# Altium PCB DLP.PcbDoc
Units mil, origin at the board's own origin, x right, y up, seen from the top; angles counter-clockwise.
Board outline 6000 x 4000 mil, 2 copper layers (Top Layer, Bottom Layer); 59 components, 221 nets, 461 pads, 232 vias.
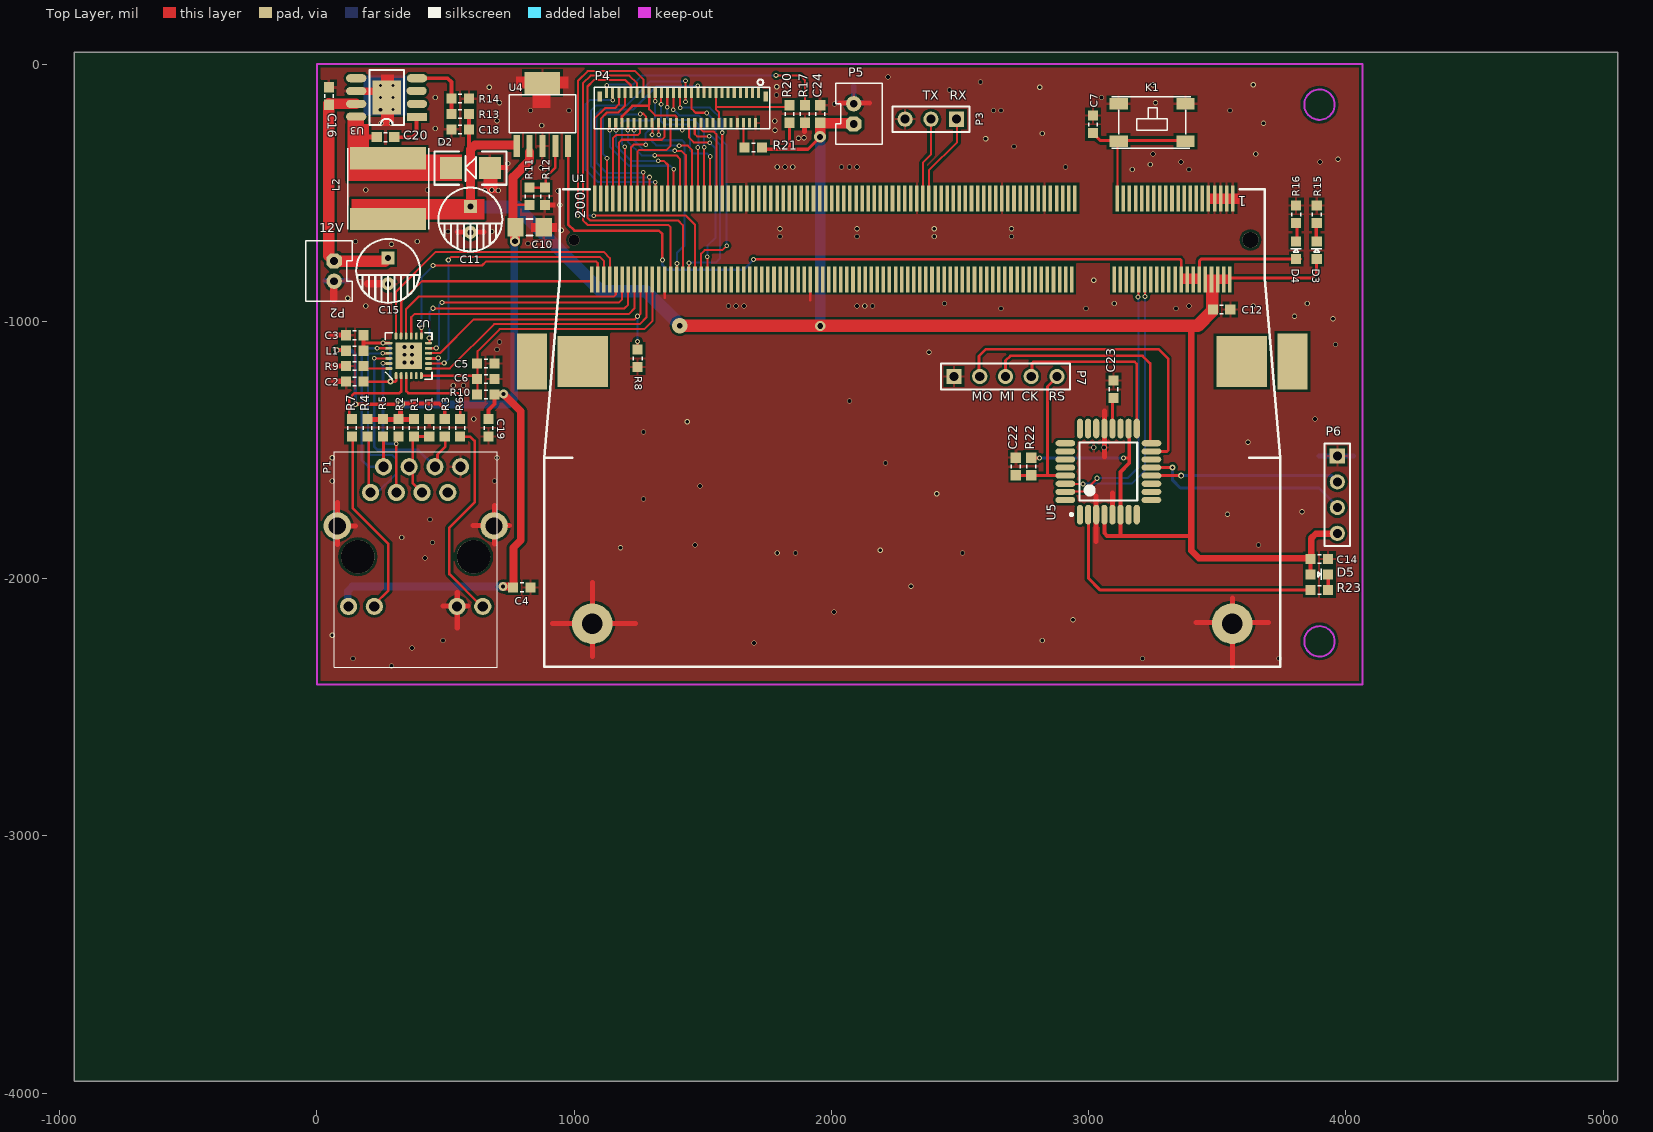
[diagram p0: Top Layer view]
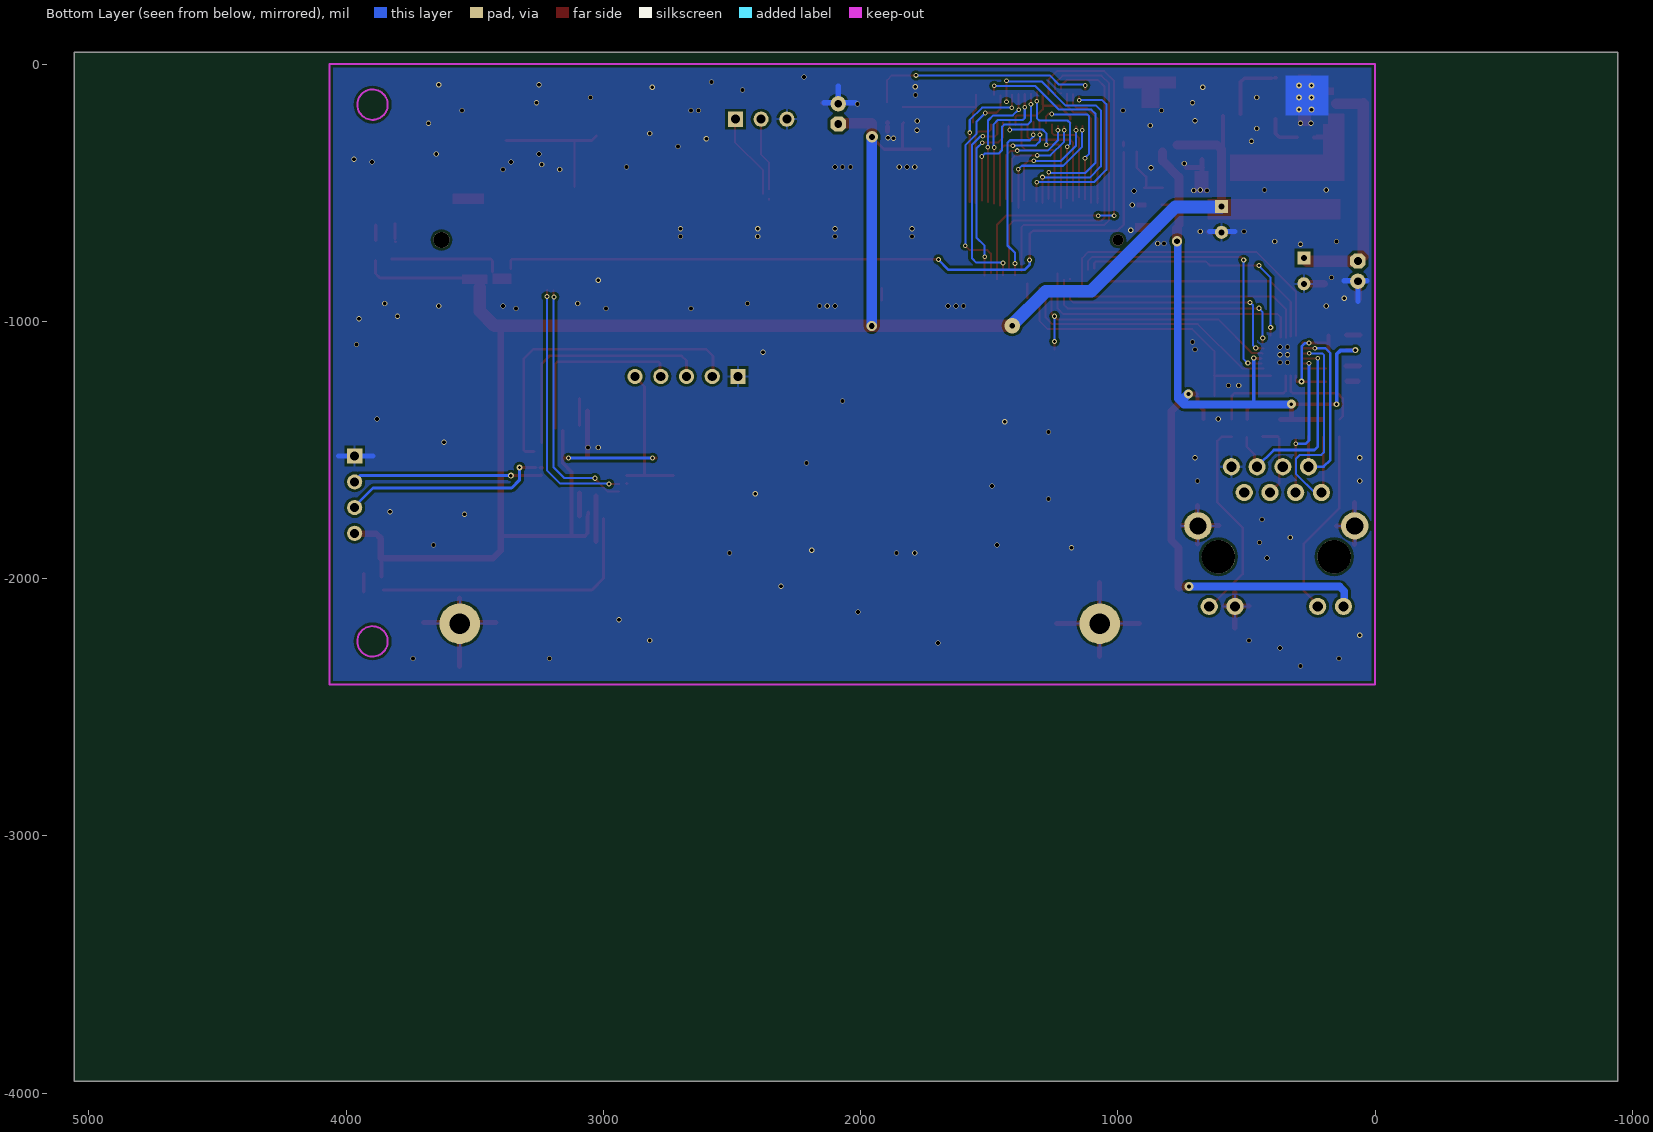
[diagram p1: Bottom Layer view, seen from below]

## Layer stack, top to bottom
Top Layer: signal copper 1.4
Dielectric: dielectric 12.6, FR-4, Dk 4.8
Bottom Layer: signal copper 1.4

## Board outline
-943,-3954 5057,-3954 5057,46 -943,46

## Design rules (kind name [scope] priority, off if disabled: settings)
Clearance [All] p1 off: gap=10
ComponentClearance [All] p1 off: gap=10 collisioncheckmode=3 verticalgap=10
HoleSize [All] p1: absolutevalues=TRUE maxlimit=150 minlimit=1 maxpercent=80.000 minpercent=20.000
PolygonConnect [All] p1: connectstyle=Relief reliefconductorwidth=10 reliefentries=4 polygonreliefangle="90 Angle"
RoutingVias [All] p1: holewidth=14 width=28 viastyle="Through Hole" minholewidth=8 minwidth=15 maxholewidth=130 maxwidth=150
SolderMaskExpansion [All] p1: expansion=4
TestPointUsage [All] p1: valid=0 allowmultiple=FALSE
Testpoint [All] p1: side=15 testpointundercomponent=TRUE minsize=40 maxsize=100 preferedsize=60 minholesize=0 maxholesize=40 preferedholesize=32 testpointgrid=1 style=1023 order=0-112345678
Width [All] p1: maxlimit=100 minlimit=8 preferedwidth=10 minimp=50.000000 maximp=50.000000 favimp=50.000000
17 further rules are at their usual default settings.

## Components (designator, comment, footprint, x,y, rotation, side; value= is the part's Value field where it differs from the comment)
C1 "104" 0603 437,-1414 r90 top
C2 "104" 0603 147,-1234 r180 top
C3 "104" 0603 147,-1054 r180 top
C4 "104" 0603 797,-2034 r180 top
C5 "104" 0603 657,-1164 r0 top
C6 "104" 0603 657,-1224 r0 top
C7 "100PF" 0603 3017,-234 r270 top
C10 "470uF/16V" 3216[1206] 827,-634 r0 top
C11 "470uF/16V" C6.3*12 597,-654 r90 top
C12 "100nF" 0603 3517,-954 r180 top
C14 "100nF" 0603 3897,-1924 r180 top
C15 "100uF/35V" C6.3*12 277,-854 r90 top
C16 "100nF" 0603 47,-124 r270 top
C18 "106" 0603 557,-254 r180 top
C19 "104" 0603 667,-1414 r90 top
C20 "10nF" 0603 267,-284 r0 top
C22 "Cap" 0603 2717,-1564 r90 top
C23 "Cap" 0603 3097,-1264 r90 top
C24 "Cap" 0603 1957,-194 r90 top (schematic designator C23)
D2 "SS34" SMA 597,-404 r180 top
D3 "BLUE" 0603-LED 3887,-724 r90 top
D4 "BLUE" 0603-LED 3807,-724 r90 top
D5 "BLUE" 0603-LED 3897,-1984 r0 top
K1 "AJ" 4*4*1.5 3117,-154 r0 top
L1 "120 OHM@100MHz" 0603 147,-1114 r180 top
L2 "10uH/4A" 8040 277,-484 r270 top
P1 "HR911105A" HR911105A 357,-1794 r0 top
P2 "CON2" PH2.0-2P 67,-844 r270 top
P3 "" HDR1X3 2487,-214 r180 top
P4 "FPC-51PIN" FH26-51S-0.3SHW 1717,-114 r0 top
P5 "Header 2" PH2.0-2P 2087,-154 r90 top
P6 "CSB" HDR1X4 3967,-1524 r270 top
P7 "Header 5" HDR1X5 2477,-1214 r0 top
R1 "49R9" 0603 377,-1414 r90 top
R2 "49R9" 0603 317,-1414 r90 top
R3 "49R9" 0603 497,-1414 r90 top
R4 "49R9" 0603 197,-1414 r90 top
R5 "49R9" 0603 257,-1414 r90 top
R6 "330R" 0603 557,-1414 r90 top
R7 "330R" 0603 137,-1414 r90 top
R8 "75R" 0603 1247,-1144 r90 top
R9 "75R" 0603 147,-1174 r0 top
R10 "75R" 0603 657,-1284 r180 top
R11 "52.3K" 0603 827,-514 r270 top
R12 "30.1K" 0603 887,-514 r270 top
R13 "4.3KF" 0603 557,-194 r0 top
R14 "1.5KF" 0603 557,-134 r0 top
R15 "1K" 0603 3887,-584 r270 top
R16 "1K" 0603 3807,-584 r270 top
R17 "Res1" 0603 1897,-194 r90 top
R20 "Res1" 0603 1837,-194 r90 top
R21 "Res1" 0603 1697,-324 r180 top
R22 "Res1" 0603 2777,-1564 r90 top
R23 "1K" 0603 3897,-2044 r0 top
U1 "MAX6-200" "SO-DIMM 200" 2317,-1414 r180 top locked
U2 "LAN8720A" QFN24_4X4MM 357,-1134 r90 top
U3 "LM22676" SO-8HP 277,-154 r180 top
U4 "TPS737" SOT223-6 877,-74 r0 top
U5 "ATmega48PA" 32A_M 3077,-1584 r90 top

## Footprints (in the part's own frame and the unit in brackets; to place one, negate y for a bottom-side part, rotate by r counter-clockwise, add the part's x,y. Pads: shape width x height; smd on the part's side, far side on the other; paste and mask are expansions set on the pad)
4*4*1.5 [mm]
  rect 1.8x1.1 smd: 1(0,0) 2(6.6,0) 3(0,-3.7) 4(6.6,-3.7)
  silkscreen extent -0.7,-4.4 7.1,0.7
32A_M [mm] "32-Pin Thin Quad Flat Pack 0.8 mm Pitch, IPC Low Density"
  oval 1.95x0.6 smd: 1(-4.25,2.8) 2(-4.25,2) 3(-4.25,1.2) 4(-4.25,0.4) 5(-4.25,-0.4) 6(-4.25,-1.2) 7(-4.25,-2) 8(-4.25,-2.8) 17(4.25,-2.8) 18(4.25,-2) 19(4.25,-1.2) 20(4.25,-0.4) 21(4.25,0.4) 22(4.25,1.2) 23(4.25,2) 24(4.25,2.8)
  oval 0.6x1.95 smd: 9(-2.8,-4.25) 10(-2,-4.25) 11(-1.2,-4.25) 12(-0.4,-4.25) 13(0.4,-4.25) 14(1.2,-4.25) 15(2,-4.25) 16(2.8,-4.25) 25(2.8,4.25) 26(2,4.25) 27(1.2,4.25) 28(0.4,4.25) 29(-0.4,4.25) 30(-1.2,4.25) 31(-2,4.25) 32(-2.8,4.25)
  silkscreen extent -4.37,-2.85 2.85,3.77, body extent -3.5,-3.5 3.5,3.5, height 1.2
0603 [mm]
  rect 1x1 smd: 1(-0.864,0) 2(0.864,0)
  silkscreen extent -0.18,-0.43 0.18,0.43
0603-LED [mm]
  rect 1x1 smd: 1(-0.864,0) 2(0.864,0)
  silkscreen extent -0.18,-0.51 0.18,0.56
3216[1206] [mm] "Chip Resistor; Body 3.2 x 1.6 mm (LxW typ)"
  rect 1.6x1.8 smd: 1(-1.4,0) 2(1.4,0)
  silkscreen extent -0.3,-0.8 0.3,0.8
8040 [mm]
  rect 2.2x7.5 smd: 1(-3,0) 2(3,0)
  silkscreen extent -4,-4 4,4
C6.3*12 [mm]
  rect 1.3x1.3 hole 0.6: 1(2.54,0)
  round 1.3 hole 0.6: 2(0,0)
  silkscreen extent -1.88,-3.15 4.42,3.15
FH26-51S-0.3SHW [mm]
  rect 0.45x1 smd: 0(-15.7,-0.3) 0(0.7,-0.3)
  rect 0.3x0.95 smd: 1(0,0.05) 2(-0.3,-2.91) 3(-0.6,0.05) 4(-0.9,-2.91) 5(-1.2,0.05) 6(-1.5,-2.91) 7(-1.8,0.05) 8(-2.1,-2.91) 9(-2.4,0.05) 10(-2.7,-2.91) 11(-3,0.05) 12(-3.3,-2.91) 13(-3.6,0.05) 14(-3.9,-2.91) 15(-4.2,0.05) 16(-4.5,-2.91) 17(-4.8,0.05) 18(-5.1,-2.91) 19(-5.4,0.05) 20(-5.7,-2.91) 21(-6,0.05) 22(-6.3,-2.91) 23(-6.6,0.05) 24(-6.9,-2.91) 25(-7.2,0.05) 26(-7.5,-2.91) 27(-7.8,0.05) 28(-8.1,-2.91) 29(-8.4,0.05) 30(-8.7,-2.91) 31(-9,0.05) 32(-9.3,-2.91) 33(-9.6,0.05) 34(-9.9,-2.91) 35(-10.2,0.05) 36(-10.5,-2.91) 37(-10.8,0.05) 38(-11.1,-2.91) 39(-11.4,0.05) 40(-11.7,-2.91) 41(-12,0.05) 42(-12.3,-2.91) 43(-12.6,0.05) 44(-12.9,-2.91) 45(-13.2,0.05) 46(-13.5,-2.91) 47(-13.8,0.05) 48(-14.1,-2.91) 49(-14.4,0.05) 50(-14.7,-2.91) 51(-15,0.05)
  silkscreen extent -16.2,-3.5 1.1,1.38
HDR1X3 [mm] "Connector; Header; 3 Position"
  rect 1.5x1.5 hole 0.9: 1(0,0)
  round 1.5 hole 0.9: 2(2.54,0) 3(5.08,0)
  silkscreen extent -1.27,-1.27 6.35,1.27
HDR1X4 [mm] "Connector; Header; 4 Position"
  rect 1.5x1.5 hole 0.9: 1(0,0)
  round 1.5 hole 0.9: 2(2.54,0) 3(5.08,0) 4(7.62,0)
  silkscreen extent -1.27,-1.27 8.89,1.27
HDR1X5 [mm] "Connector; Header; 5 Position"
  rect 1.5x1.5 hole 0.9: 1(0,0)
  round 1.5 hole 0.9: 2(2.54,0) 3(5.08,0) 4(7.62,0) 5(10.16,0)
  silkscreen extent -1.27,-1.27 11.43,1.27
HR911105A [mm]
  round 1.699 hole 1.001: 1(-3.762,3.275) 2(-2.492,5.815) 3(-1.222,3.275) 4(0.048,5.815) 5(1.318,3.275) 6(2.588,5.815) 7(3.858,3.275) 8(5.128,5.815) 9(-5.937,-7.975) 10(-3.397,-7.975) 11(4.773,-7.975) 12(7.313,-7.975)
  round 2.7 hole 1.7: 13(-7.057,-0.025) 14(8.433,-0.025)
  round 3.3 hole 3.3: ""(-5.027,-3.075) ""(6.403,-3.075)
  silkscreen extent -7.36,-14 8.74,7.3
PH2.0-2P [mil]
  oct 60x60 hole 30: 1(-78.74,0)
  round 60 hole 30: 2(0,0)
  silkscreen extent -157,-110 79,70
QFN24_4X4MM [mil]
  oval 28x11 smd: 1(-77.01,49.21) 2(-77.01,29.53) 3(-77.01,9.84) 4(-77.01,-9.84) 5(-77.01,-29.53) 6(-77.01,-49.21) 13(77.01,-49.21) 14(77.01,-29.53) 15(77.01,-9.84) 16(77.01,9.84) 17(77.01,29.53) 18(77.01,49.21)
  oval 11x28 smd: 7(-49.21,-77.01) 8(-29.53,-77.01) 9(-9.84,-77.01) 10(9.84,-77.01) 11(29.53,-77.01) 12(49.21,-77.01) 19(49.21,77.01) 20(29.53,77.01) 21(9.84,77.01) 22(-9.84,77.01) 23(-29.53,77.01) 24(-49.21,77.01)
  rect 103x103 smd: 25(0,0)
  silkscreen extent -91,-91 91,91
SMA [mm] "Molded Diode, 2-Leads, Body 4.3x2.7mm, IPC Medium Density"
  rect 2.15x2.15 smd: 1(-1.93,0) 2(1.93,0)
  silkscreen extent -3.56,-1.65 3.56,1.65, body extent -2.28,-1.42 2.29,1.42, height 2.95
SO-8HP [mm]
  rect 2x0.8 smd: 1(-2.847,1.29)
  oval 2x0.8 smd: 2(-2.847,0.02) 3(-2.813,-1.275) 4(-2.847,-2.52) 5(3.153,-2.52) 6(3.153,-1.25) 7(3.153,0.02) 8(3.153,1.265)
  rect 2.8x3.4 smd: 9(0.128,-0.615)
  silkscreen extent -1.55,-3.31 1.85,2.09
"SO-DIMM 200" [mm]
  rect 3x5.5 smd: 0(-37.487,-6.553) 0(37.613,-6.553)
  round 1.6 hole 1.6: 0(-33.337,-18.553)
  rect 5x5 smd: 0(-32.487,-6.553) 0(32.613,-6.553)
  round 1.1 hole 1.1: 0(33.463,-18.553)
  rect 0.35x2.55 smd: 1(-31.587,-22.653) 2(-31.287,-14.653) 3(-30.987,-22.653) 4(-30.687,-14.653) 5(-30.387,-22.653) 6(-30.087,-14.653) 7(-29.787,-22.653) 8(-29.487,-14.653) 9(-29.187,-22.653) 10(-28.887,-14.653) 11(-28.587,-22.653) 12(-28.287,-14.653) 13(-27.987,-22.653) 14(-27.687,-14.653) 15(-27.387,-22.653) 16(-27.087,-14.653) 17(-26.787,-22.653) 18(-26.487,-14.653) 19(-26.187,-22.653) 20(-25.887,-14.653) 21(-25.587,-22.653) 22(-25.287,-14.653) 23(-24.987,-22.653) 24(-24.687,-14.653) 25(-24.387,-22.653) 26(-24.087,-14.653) 27(-23.787,-22.653) 28(-23.487,-14.653) 29(-23.187,-22.653) 30(-22.887,-14.653) 31(-22.587,-22.653) 32(-22.287,-14.653) 33(-21.987,-22.653) 34(-21.687,-14.653) 35(-21.387,-22.653) 36(-21.087,-14.653) 37(-20.787,-22.653) 38(-20.487,-14.653) 39(-20.187,-22.653) 40(-19.887,-14.653) 41(-15.987,-22.653) 42(-15.687,-14.653) 43(-15.387,-22.653) 44(-15.087,-14.653) 45(-14.787,-22.653) 46(-14.487,-14.653) 47(-14.187,-22.653) 48(-13.887,-14.653) 49(-13.587,-22.653) 50(-13.287,-14.653) 51(-12.987,-22.653) 52(-12.687,-14.653) 53(-12.387,-22.653) 54(-12.087,-14.653) 55(-11.787,-22.653) 56(-11.487,-14.653) 57(-11.187,-22.653) 58(-10.887,-14.653) 59(-10.587,-22.653) 60(-10.287,-14.653) 61(-9.987,-22.653) 62(-9.687,-14.653) 63(-9.387,-22.653) 64(-9.087,-14.653) 65(-8.787,-22.653) 66(-8.487,-14.653) 67(-8.187,-22.653) 68(-7.887,-14.653) 69(-7.587,-22.653) 70(-7.287,-14.653) 71(-6.987,-22.653) 72(-6.687,-14.653) 73(-6.387,-22.653) 74(-6.087,-14.653) 75(-5.787,-22.653) 76(-5.487,-14.653) 77(-5.187,-22.653) 78(-4.887,-14.653) 79(-4.587,-22.653) 80(-4.287,-14.653) 81(-3.987,-22.653) 82(-3.687,-14.653) 83(-3.387,-22.653) 84(-3.087,-14.653) 85(-2.787,-22.653) 86(-2.487,-14.653) 87(-2.187,-22.653) 88(-1.887,-14.653) 89(-1.587,-22.653) 90(-1.287,-14.653) 91(-0.987,-22.653) 92(-0.687,-14.653) 93(-0.387,-22.653) 94(-0.087,-14.653) 95(0.213,-22.653) 96(0.513,-14.653) 97(0.813,-22.653) 98(1.113,-14.653) 99(1.413,-22.653) 100(1.713,-14.653) 101(2.013,-22.653) 102(2.313,-14.653) 103(2.613,-22.653) 104(2.913,-14.653) 105(3.213,-22.653) 106(3.513,-14.653) 107(3.813,-22.653) 108(4.113,-14.653) 109(4.413,-22.653) 110(4.713,-14.653) 111(5.013,-22.653) 112(5.313,-14.653) 113(5.613,-22.653) 114(5.913,-14.653) 115(6.213,-22.653) 116(6.513,-14.653) 117(6.813,-22.653) 118(7.113,-14.653) 119(7.413,-22.653) 120(7.713,-14.653) 121(8.013,-22.653) 122(8.313,-14.653) 123(8.613,-22.653) 124(8.913,-14.653) 125(9.213,-22.653) 126(9.513,-14.653) 127(9.813,-22.653) 128(10.113,-14.653) 129(10.413,-22.653) 130(10.713,-14.653) 131(11.013,-22.653) 132(11.313,-14.653) 133(11.613,-22.653) 134(11.913,-14.653) 135(12.213,-22.653) 136(12.513,-14.653) 137(12.813,-22.653) 138(13.113,-14.653) 139(13.413,-22.653) 140(13.713,-14.653) 141(14.013,-22.653) 142(14.313,-14.653) 143(14.613,-22.653) 144(14.913,-14.653) 145(15.213,-22.653) 146(15.513,-14.653) 147(15.813,-22.653) 148(16.113,-14.653) 149(16.413,-22.653) 150(16.713,-14.653) 151(17.013,-22.653) 152(17.313,-14.653) 153(17.613,-22.653) 154(17.913,-14.653) 155(18.213,-22.653) 156(18.513,-14.653) 157(18.813,-22.653) 158(19.113,-14.653) 159(19.413,-22.653) 160(19.713,-14.653) 161(20.013,-22.653) 162(20.313,-14.653) 163(20.613,-22.653) 164(20.913,-14.653) 165(21.213,-22.653) 166(21.513,-14.653) 167(21.813,-22.653) 168(22.113,-14.653) 169(22.413,-22.653) 170(22.713,-14.653) 171(23.013,-22.653) 172(23.313,-14.653) 173(23.613,-22.653) 174(23.913,-14.653) 175(24.213,-22.653) 176(24.513,-14.653) 177(24.813,-22.653) 178(25.113,-14.653) 179(25.413,-22.653) 180(25.713,-14.653) 181(26.013,-22.653) 182(26.313,-14.653) 183(26.613,-22.653) 184(26.913,-14.653) 185(27.213,-22.653) 186(27.513,-14.653) 187(27.813,-22.653) 188(28.113,-14.653) 189(28.413,-22.653) 190(28.713,-14.653) 191(29.013,-22.653) 192(29.313,-14.653) 193(29.613,-22.653) 194(29.913,-14.653) 195(30.213,-22.653) 196(30.513,-14.653) 197(30.813,-22.653) 198(31.113,-14.653) 199(31.413,-22.653) 200(31.713,-14.653)
  round 4 hole 2: 201(-31.53,19.336) 202(31.657,19.336)
  silkscreen extent -36.29,-23.55 36.41,23.57
SOT223-6 [mm]
  rect 0.6x2.2 smd: 1(-2.54,-6.2) 2(-1.27,-6.2) 3(0,-6.2) 4(1.27,-6.2) 5(2.54,-6.2)
  rect 3.5x2.2 smd: 6(0,0)
  silkscreen extent -3.3,-4.9 3.3,-1.17

## Part data
C22 C23 C24: "Capacitor"
D5: library part LED2, "Typical RED, GREEN, YELLOW, AMBER GaAs LED"
P5: "Header, 2-Pin"
P6: library part "Header 4", "Header, 4-Pin"
P7: "Header, 5-Pin"
R17 R20 R21 R22: "Resistor"
R23: library part Res1, "Resistor"
U5: library part ATmega8-16AC, "8-Bit AVR Microcontroller with 8K Bytes of In-System Programmable Flash Memory"

## Via types
v1: diameter 20, hole 15, Top Layer to Bottom Layer, 146 vias
v2: diameter 18, hole 10, Top Layer to Bottom Layer, 48 vias
v3: diameter 20, hole 12, Top Layer to Bottom Layer, 20 vias
v4: diameter 23.62, hole 11.81, Top Layer to Bottom Layer, 5 vias
v5: diameter 23, hole 13, Top Layer to Bottom Layer, 3 vias
v6: diameter 35, hole 15, Top Layer to Bottom Layer, 3 vias
v7: diameter 40, hole 22, Top Layer to Bottom Layer, 2 vias
v8: diameter 23.62, hole 14, Top Layer to Bottom Layer, 1 vias
v9: diameter 22, hole 13, Top Layer to Bottom Layer, 1 vias
v10: diameter 45, hole 22, Top Layer to Bottom Layer, 1 vias
v11: diameter 60, hole 22, Top Layer to Bottom Layer, 1 vias
v12: diameter 22, hole 12, Top Layer to Bottom Layer, 1 vias

## Nets (pads, with @x,y where several pads share a name; then routed paths per layer and width w, separated by ;. In a path a pad name is that pad's centre, name@x,y a point inside that pad or via, vN(x,y) a via of type N, cw(c..) or ccw(c..) an arc to the next point about the centre after c; other vN are vias at no path point)
3P3V: D4.1 U1.12 U1.14 U1.16 U1.18 U4.5 | length 3306.4
  Top Layer w10: U4.5@977,-343 977,-623 1001,-647 1329,-647 1343,-661 v3@1343,-761 ; v3@1698,-758 3355,-758 3360,-763 U1.18@3360,-795
  Top Layer w12: U4.5@977.76,-318.11 U4.5@978,-303 ; U1.12@3431,-807 3431,-765 3439,-757 D4.1@3823,-757
  Bottom Layer w10: v3@1343,-763 1343,-780 1363,-800 1658,-800 v3@1697.5,-760.5
  other v3: 1343,-762 1698,-760
5VIN: C11.1 C12.2 C14.2 C18.1 C24.1 D3.1 D5.1 L2.2 P5.1 P6.4 R13.2 R20.1 R21.1 R22.2 U1.2 U1.4 U1.6 U1.8 U1.10 U4.1 U5.4 U5.6 U5.18 | length 8145.9
  Top Layer w12: R21.1@1728,-331 1909,-331 v10@1956,-284 ; R20.1@1833,-228 R20.1@1833.1,-228.62 ; 1837,-328 R20.1@1837,-231 ; R22.2@2795,-1531 v3(2809,-1531) ; v3(3136,-1531) 3153,-1531 ; 3538,-831 3869,-831 3886,-814 D3.1@3886,-764
  Top Layer w15: 592,-321 R13.2@592,-201 ; U5.4@3059,-1743 U5.4@3059.36,-1751.4 ; U5.4@3061.25,-1758 3061.25,-1823.25 3072,-1834 3393,-1834 ; 3124,-1830 3124,-1585 3158,-1551 U5.18@3158,-1425 ; D5.1@3863,-1992 C14.2
  Top Layer w25: 3399,-1034 3399,-1891 3429,-1921 C14.2@3863,-1921 ; C14.2@3865,-1921 3865,-1844 3883,-1826 P6.4@3966,-1826 ; P6.4@3957,-1827 P6.4@3958,-1827
  Top Layer w35: C11.1@597,-553 597,-332 614,-315 U4.1@770,-315
  Top Layer w40: v10@1956,-284 1957,-284 1957,-230 P5.1@2082,-230
  Top Layer w50: v11(1411,-1017) 3424,-1017 3481,-960 U1.8@3481,-870
  Bottom Layer w12: v3(2809,-1531) v3@3134,-1531
  Bottom Layer w40: v7(1957,-1018) v10@1957,-285
  Bottom Layer w50: C11.1@598,-555 777,-555 1105,-883 1280,-883 v11@1412.5,-1015.5
  other v10: 1956,-283
12V: C15.1 C16.2 P2.1 U3.7 | length 936.3
  Top Layer w40: C16.2@47,-154 U3.7@152.05,-154
  Top Layer w45: C16.2@47,-154 47,-745 69,-767 264,-767 C15.1@274,-757
+5V: 
+12: 
AUD3_RXD: U1.114
AUD3_TXC: U1.110
AUD3_TXD: U1.112
AUD3_TXFS: U1.116
CAN1_RX: U1.119
CAN1_TX: U1.117
CAN2_RX: U1.124
CAN2_TX: U1.122
CLK1_N: U1.84
CLK1_P: U1.82
CPUSYNC: P4.51 R17.2 | length 893
  Top Layer w8: P4.51@1127,-97 v2(1127,-83) ; v2(1785,-44) 1879,-44 1897,-62 R17.2@1897,-149
  Bottom Layer w8: v2@1127,-79 1230,-79 1265,-44 v2(1785,-44)
CSB_CS: P6.3 U5.13 | length 794.9
  Top Layer w12: U5.13@3262,-1568 v5@3324,-1568
  Top Layer w15: U5.13@3239,-1569 U5.13@3244.33,-1568.92
  Bottom Layer w12: v5@3327,-1568 3327,-1618 3357,-1648 3896,-1648 P6.3@3964,-1716
  other v5: 3326,-1568
CSB_SIG: P6.2 U5.12 | length 723.3
  Top Layer w12: U5.12@3249,-1600 v5@3361,-1600
  Top Layer w15: U5.12@3243,-1598 U5.12@3244.39,-1598.05
  Bottom Layer w12: v5@3363,-1600 3946,-1600 P6.2@3965,-1619
  other v5: 3360,-1600
CSI0_DAT12: U1.107
CSI0_DAT13: U1.105
CSI0_DAT14: U1.99
CSI0_DAT15: U1.115
CSI0_DAT16: U1.97
CSI0_DAT17: U1.95
CSI0_DAT18: U1.103
CSI0_DAT19: U1.101
CSI0_DATA_EN/VOL-: U1.24
CSI0_HSYNCH: U1.113
CSI0_PIXCLK: U1.111
CSI0_VSYNCH: U1.109
CSI_CLK0M: U1.85
CSI_CLK0P: U1.87
CSI_D0M: U1.81
CSI_D0P: U1.83
CSI_D1M: U1.77
CSI_D1P: U1.79
CSPI1_CLK: U1.47
CSPI1_CS0: U1.41
CSPI1_MISO: U1.43
CSPI1_MOSI: U1.45
CSPI1_RDY: U1.49
CSPI2_CLK: U1.31
CSPI2_CS0: U1.25
CSPI2_CS1: U1.33
CSPI2_MISO: U1.35
CSPI2_MOSI: U1.29
CSPI2_RDY: U1.27
DISP0_CLK: P4.49 U1.179 | length 748.5
  Top Layer w8: v2@1151,-139 P4.49@1151,-125 ; U1.179@1316,-534 v2(1316,-459)
  Bottom Layer w8: v2@1151,-140 1061,-140 1045,-156 1045,-411 1093,-459 v2@1317,-459
  other v2: 1150,-140
DISP0_CONTRAST: U1.177
DISP0_DAT0: P4.45 U1.197 | length 488.7
  Top Layer w8: U1.197@1104,-539 1104,-212 1128,-188 1172,-188 1198,-162 P4.45@1198,-115
DISP0_DAT1: P4.44 U1.171 | length 454.2
  Top Layer w8: v2@1209,-256 P4.44@1209,-242 ; v2@1315,-354 1316,-355 1398,-355 1411,-368 U1.171@1411,-534
  Bottom Layer w8: v2(1209,-257) 1209,-301 1263,-355 v2@1315,-355
  other v2: 1313,-355
DISP0_DAT2: P4.43 U1.170 | length 1272.5
  Top Layer w8: P4.43@1221,-97 1221,-83 1200,-62 1077,-62 1052,-87 1052,-597 1063,-608 1405,-608 1423,-626 1423,-799 U1.170@1424,-800 ; P4.43@1221.88,-111.99 P4.43@1222,-115
DISP0_DAT3: P4.42 U1.169 | length 446.6
  Top Layer w8: v2@1233,-255 P4.42@1233,-241 ; v2@1393,-337 1417,-337 1434,-354 U1.169@1434,-524
  Bottom Layer w8: v2(1233,-257) 1233,-296 1273,-336 v2@1392,-336
  other v2: 1391,-336
DISP0_DAT4: P4.41 U1.174 | length 1324
  Top Layer w8: P4.41@1244,-122 P4.41@1244.16,-112.02 ; P4.41@1245,-99 1245,-75 1215,-45 1064,-45 1034,-75 1034,-607 1052,-625 1366,-625 1375,-634 U1.174@1375,-804
DISP0_DAT5: P4.40 U1.193 | length 376.1
  Top Layer w8: U1.193@1151,-518 1151,-288 1163,-276 1247,-276 1257,-266 P4.40@1257,-235
DISP0_DAT6: P4.39 U1.166 | length 1544.6
  Top Layer w8: v2(1015,-589) 1015,-65 1053,-27 1237,-27 1269,-59 P4.39@1269,-116 ; v2@1077,-589 1435,-589 1470.02,-624.02 U1.166
  Bottom Layer w8: v2@1016,-589 v2(1076,-589)
DISP0_DAT7: P4.38 U1.195 | length 527.6
  Top Layer w8: U1.195@1128,-526 v2@1128,-367 ; v2@1257,-193 1268.99,-193 1279.99,-204 P4.38
  Bottom Layer w8: v2@1127,-366 1127,-363 1112,-348 1112,-203 1120,-195 v2@1256,-195
  other v2: 1128,-366 1257,-194
DISP0_DAT8: P4.36 U1.167 | length 456.1
  Top Layer w8: v2@1304,-274 P4.36@1304,-226 ; v2@1413,-317 1442,-317 1458,-333 U1.167@1458,-549
  Bottom Layer w8: v2(1303,-275) 1303,-300 1319,-316 1409,-316 v2@1411,-318
  other v2: 1408,-317
DISP0_DAT9: P4.35 U1.189 | length 538.6
  Top Layer w8: U1.189@1198,-522.14 v2@1198,-321 ; v2@1315,-145 P4.35@1315,-109
  Bottom Layer w8: v2@1197,-322 1197,-320 1186,-309 1186,-229 1196,-219 1306,-219 1315,-210 v2@1315,-143
  other v2: 1197,-321 1315,-144
DISP0_DAT10: P4.34 U1.172 | length 695.1
  Top Layer w8: v2@1328,-274 P4.34@1328,-226 ; U1.172@1400,-822 v2@1400,-774
  Bottom Layer w8: v2@1329,-275 1329,-283 1342,-296 1420,-296 1429,-305 1429,-705 1400,-734 v2(1400,-775)
  other v2: 1329,-274
DISP0_DAT11: P4.33 U1.161 | length 581.1
  Top Layer w8: v2@1338,-157 P4.33@1338,-115 ; U1.161@1529,-531 v2(1529,-359)
  Bottom Layer w8: v2(1338,-156) 1338,-222 1351,-235 1442,-235 1450,-243 1450,-334 1464,-348 1518,-348 v2(1529,-359)
DISP0_DAT12: P4.32 U1.191 | length 463.3
  Top Layer w8: U1.191@1175,-532 1175,-304 1185,-294 1341,-294 1351,-284 P4.32@1351,-233
DISP0_DAT13: P4.31 U1.165 | length 530.9
  Top Layer w8: v2@1362,-169 P4.31@1362,-116 ; U1.165@1482,-541 v2@1482,-323
  Bottom Layer w8: v2@1362,-171 1362,-210 1369,-217 1466,-217 1483,-234 v2@1483,-324
  other v2: 1481,-324 1362,-168
DISP0_DAT14: P4.30 U1.185 | length 415.5
  Top Layer w8: U1.185@1246,-533 1246,-341 1254,-333 1360,-333 1375,-318 P4.30@1375,-233
DISP0_DAT15: P4.29 U1.163 | length 512.7
  Top Layer w8: v2@1386,-179 P4.29@1386,-117 ; U1.163@1505,-535 v2@1505,-324
  Bottom Layer w8: v2@1386.5,-177.5 1408,-199 1485,-199 1505,-219 v2@1505,-323
  other v2: 1506,-323 1386,-178
DISP0_DAT16: P4.27 U1.157 | length 545.9
  Top Layer w8: v2@1411,-168 P4.27@1411,-119 ; U1.157@1576,-535 v2@1576,-267
  Bottom Layer w8: v2@1415,-169 1528,-169 1576,-217 v2@1576,-265
  other v2: 1576,-266 1412,-169
DISP0_DAT17: P4.26 U1.187 | length 523.2
  Top Layer w8: U1.187@1222,-559 1222,-322 1231,-313 v2@1280,-313 ; v2(1421,-256) P4.26@1421,-224
  Bottom Layer w8: v2@1275,-312 1278,-309 1278,-269 1293,-254 v2@1420,-254
  other v2: 1278,-313
DISP0_DAT18: P4.25 U1.181 | length 1063
  Top Layer w8: U1.181@1293,-540 v2@1293,-440 ; v2(1433,-146) P4.25@1433,-108 ; P4.25@1433,-112 v2@1433,-64
  Bottom Layer w8: v2@1294,-441 1110,-441 1066,-397 1066,-180 1086,-160 1204,-160 1297,-67 v2@1433,-67
  other v2: 1293,-439 1433,-65
DISP0_DAT19: P4.24 U1.162 | length 687.7
  Top Layer w8: P4.24@1446,-227 1446,-285 1465,-304 v2@1528,-304 ; U1.162@1518,-821 v2@1518,-751
  Bottom Layer w8: v2@1518,-752 1518,-706 1550,-674 1550,-328 v2(1527,-305)
  other v2: 1518,-749
DISP0_DAT20: P4.23 U1.164 | length 851.9
  Top Layer w8: P4.23@1457,-122 1457,-174 1472,-189 v2@1515,-189 ; U1.164@1494,-812 1494,-737 1508,-723 1576,-723 v2(1593,-706)
  Bottom Layer w8: v2@1516,-189 1516,-190 1549,-223 1549,-271 1593,-315 v2(1593,-706)
  other v2: 1515,-190
DISP0_DAT21: P4.22 U1.168 | length 771.4
  Top Layer w8: U1.168@1446,-821 v3@1446,-773 ; P4.22@1469,-225 1469,-272 1478,-281 v2@1522,-281
  Bottom Layer w8: v3@1451,-772 1550,-772 1567,-755 1567,-314 1534,-281 v2@1525,-281
  other v2: 1526,-281
  other v3: 1447,-773
DISP0_DAT22: P4.21 U1.183 | length 972.9
  Top Layer w8: U1.183@1269,-525 v2@1269,-423 ; P4.21@1480.95,-112.03 P4.21@1481,-105 ; P4.21@1481,-120 v2@1481,-85
  Bottom Layer w8: v2@1269,-423 1126,-423 1087,-384 1087,-193 1103,-177 1229,-177 1321,-85 v2@1482,-85
  other v2: 1269,-421 1481,-84
DISP0_DAT23: P4.20 U1.159 | length 354.3
  Top Layer w8: P4.20@1494,-234 1493,-235 1493,-253 1502,-262 1543,-262 1553,-272 U1.159@1553,-539
DISP0_DRDY: P4.50 U1.173 | length 513.5
  Top Layer w8: v2@1138,-255 P4.50@1138,-241 ; U1.173@1387,-559 v2(1387,-409)
  Bottom Layer w8: v2@1139,-256 1139,-321 1213,-395 1373,-395 v2(1387,-409)
  other v2: 1138,-257
DISP0_HSYNCH: P4.47 U1.199 | length 488.7
  Top Layer w8: U1.199@1078,-525 U1.199@1078.11,-522.06 ; U1.199@1080,-540 1080,-211 1120,-171 1159,-171 1174,-156 P4.47@1174,-116
DISP0_VSYNCH: P4.48 U1.175 | length 447.7
  Top Layer w8: v2@1162,-257 P4.48@1162,-243 ; v2@1327,-376 1349,-376 1365,-392 U1.175@1365,-531
  Bottom Layer w8: v2(1163,-257) 1163,-318 1221,-376 v2@1328,-376
  other v2: 1327,-375
DMD: P4.11
EIM_BCLK/VOL+: U1.22
EIM_D20: U1.23
ENET0_100MLED2: R7.2 U2.2 | length 359.5
  Top Layer w10: R7.2 126,-1369 126,-1299 146,-1279 321,-1279 327.47,-1272.53 U2.2
ENET0_LINKLED1: R6.2 U2.3 | length 367.2
  Top Layer w10: U2.3 347.16,-1270.16 356.16,-1279.16 546.16,-1279.16 557,-1290 R6.2
ENET_CRS_DV: U1.190 U2.11 | length 964.3
  Top Layer w8: U2.11@439,-1104.47 v3@466.47,-1104.47 ; v3@485,-926 1175,-926 1187,-914 U1.190@1187,-874 ; U1.190@1186,-833 U1.190@1186.04,-837.11
  Bottom Layer w8: v3@464,-1104 475,-1093 475,-937 v3@485,-927
  other v3: 464,-1103 486,-926
ENET_MDC: U1.198 U2.13 | length 961.7
  Top Layer w8: v3@406,-1022 406.21,-1022.21 U2.13@406.21,-1054 ; v3(452,-783) 642,-783 658,-767 1085,-767 1092,-774 U1.198@1092,-795
  Bottom Layer w8: v3(406,-1024) 406,-830 v3@452,-784
ENET_MDIO: U1.188 U2.12 | length 1005.4
  Top Layer w8: U2.12@437,-1084.79 v3(437,-1064) ; v3@450,-950 1195,-950 1210,-935 U1.188@1210,-837.1
  Bottom Layer w8: v3(437,-1064) 437,-964 v3@451.5,-949.5
  other v3: 451,-949
ENET_NINT: C5.1 C6.1 R10.2 U1.180 U2.6 | length 1248
  Top Layer w8: R10.2@625,-1290 625,-1116 711,-1030 1273,-1030 1304,-999 U1.180@1304,-871
  Top Layer w10: U2.6 C6.1@624.79,-1211.01
ENET_NRST: U1.186 U2.15 | length 1095.5
  Top Layer w8: U2.15@366,-1063 367,-1062 367,-984 379,-972 1212,-972 1234,-950 U1.186@1234,-815
ENET_REF_CLK: U1.178
ENET_RX_ER: R8.2 U1.184 U2.10 | length 1117.2
  Top Layer w8: U2.10@438,-1125 440,-1123 479,-1123 610,-992 1236,-992 1258,-970 U1.184@1258,-871 ; R8.2@1246,-1110 v3(1246,-1078)
  Bottom Layer w8: v3@1247,-1082 v3@1247,-980
  other v3: 1246,-980
ENET_RXD0: U1.196 U2.8 | length 1113.4
  Top Layer w8: U2.8@441,-1163 v3@495,-1163 ; v3(511,-761) 523,-749 1100,-749 1115.68,-764.68 U1.196@1115.68,-801
  Bottom Layer w8: v3@495.5,-1162.5 511,-1147 v3@511,-762
  other v3: 495,-1162
ENET_RXD1: U1.182 U2.7 | length 1037
  Top Layer w8: U2.7@435,-1183 517,-1183 689,-1011 1255,-1011 1281,-985 U1.182@1281,-876
ENET_TX_EN: U1.192 U2.16 | length 969.6
  Top Layer w8: U2.16@346,-1064 347,-1063 347,-952 395,-904 1154,-904 1162,-896 U1.192@1162,-877
ENET_TXD0: U1.200 U2.17 | length 906.1
  Top Layer w8: U2.17@328,-1059 328,-924 408,-844 U1.200@1066,-844
ENET_TXD1: U1.194 U2.18 | length 1202.7
  Top Layer w8: U2.18@308,-1056 308,-884 462,-730 1115,-730 1139,-754 U1.194@1139,-880
ETH_RXN0: P1.6 R3.1 U2.22 | length 813.8
  Top Layer w8: v2(223,-1143.84) U2.22
  Top Layer w10: P1.6@469,-1583 469,-1518 499,-1488 R3.1@499,-1450
  Bottom Layer w10: v2(223,-1143.84) 223,-1487 236,-1500 393.8,-1500 P1.6
ETH_RXP0: P1.3 R2.1 U2.23 | length 586.8
  Top Layer w8: v2(257,-1163.53) U2.23
  Top Layer w10: P1.3@309,-1665 R2.1@309,-1458
  Bottom Layer w10: v2(257,-1163.53) 257,-1463 270,-1476 v2(309,-1476)
ETH_TXN0: P1.2 R5.1 U2.20 | length 742.8
  Top Layer w8: v2(234,-1104.47) U2.20
  Top Layer w10: P1.2@259,-1565 R5.1@259,-1447
  Bottom Layer w10: v2(234,-1104.47) 193.53,-1104.47 174,-1124 174,-1539 200.08,-1565.08 P1.2
ETH_TXP0: P1.1 R4.1 U2.21 | length 986.1
  Top Layer w8: v2(256,-1124.16) U2.21
  Top Layer w10: P1.1@202,-1673 R4.1@202,-1450
  Bottom Layer w8: P1.1@218,-1673 227,-1673 308,-1592 308,-1535 292,-1519 209,-1519 198,-1508 198,-1132 205.84,-1124.16 v2(256,-1124.16)
  Bottom Layer w10: v2(256,-1124.16) v2@256.16,-1124.16
FAN_ERR: P4.7
FEC_A3V2: C2.1 C3.1 L1.1 U2.1 U2.19 | length 471.4
  Top Layer w10: 181.01,-1084 U2.19@281,-1084 ; C2.1@192,-1234 304.79,-1234 307.79,-1231 U2.1
  Top Layer w15: L1.1 C3.1
  Bottom Layer w10: v2@254,-1085 273,-1085 286,-1098 v12@286,-1235
  other v2: 257,-1084
  other v12: 286,-1234
FEC_REF_CLK_PHY: U2.5
GEN_3V3: C4.2 C10.1 C19.2 L1.2 P1.9 R1.2 R2.2 R3.2 R4.2 R5.2 R10.1 R11.2 U2.9 U4.2 | length 4237.7
  Top Layer w10: 756.1,-547 R11.2@829,-547
  Top Layer w12: U2.9@443,-1144 v3@470,-1144
  Top Layer w15: v5@75,-1112 L1.2@111,-1112 ; v9@155,-1322 v6@324,-1322 ; v6@325,-1320 476,-1320 497,-1341 R3.2 ; C19.2 667,-1345 691,-1321 R10.1@691,-1295
  Top Layer w20: R4.2@204,-1381 R1.2@367,-1381 ; R2.2@325,-1370 v6@325,-1320 ; R10.1@697,-1283 v6(726,-1283)
  Top Layer w30: v6(724,-2031) C4.2@757,-2031 ; v6@729,-1285 793,-1349 793,-1851 764,-1880 C4.2@764,-2033 ; C4.2@761,-2036 C4.2@761.16,-2033.86
  Top Layer w35: C10.1@763,-623 763,-439 826,-376 U4.2@826,-342
  Top Layer w40: v7@770,-689 C10.1@770,-639
  Bottom Layer w12: 472,-1313 v3@472,-1141
  Bottom Layer w15: v5@78,-1113 135,-1113 149,-1127 v9@149,-1321
  Bottom Layer w30: P1.9@120,-2108 120,-2049 138,-2031 v6(724,-2031) ; v6@328,-1323 744,-1323 767,-1300 v7@767,-687
  Bottom Layer w35: v6@728,-1283 744,-1299
  other v3: 472,-1143
  other v5: 77,-1112
  other v6: 326,-1322
  other v7: 770,-688
  other v9: 150,-1322
GND: C1.2 C2.2 C3.2 C4.1 C5.2 C6.2 C7.1 C10.2 C11.2 C12.1 C14.1 C15.2 C16.1 C18.2 C19.1 C22.2 C23.2 C24.2 D2.1 K1.1 K1.2 P1.8 P1.11 P1.13 P1.14 P2.2 P3.3 P4.1 P4.2 P4.8 P4.19 P4.28 P4.37 P4.46 P5.2 P6.1 P7.1 R8.1 R9.1 R12.2 R14.2 R15.1 R16.1 R17.1 U1.1 U1.3 U1.5 U1.7 U1.9 U1.51 U1.65 U1.93 U1.128 U1.149 U1.176 U1.201 U1.202 U2.25 U3.6 U3.9 U4.3 U4.6 U5.3 U5.5 U5.21 | length 4073.4
  Top Layer w8: 1292,-155 1292,-176 1315,-199 1393,-199 1398,-204 P4.28@1398,-236
  Top Layer w10: P4.46@1185.97,-228.56 P4.46@1185.98,-229 ; P4.46@1186,-230 P4.46@1185.98,-229 ; P4.46@1185.99,-228.56 P4.46@1186,-229 ; P4.46@1186,-214 1186,-203 1227,-162 1291,-162 ; 1292,-156 P4.37@1292,-124 ; 1351.91,-908.91 1351.91,-893 U1.176@1352,-854 ; 1918,-917 U1.128@1918,-872
  Top Layer w20: 59,-1053 C3.2@111,-1053 ; 62,-1174 R9.1@112,-1174 ; 67,-1233 C2.2@110,-1233 ; 80,-1867 80,-1705 ; P1.13@97,-1795 150,-1795 ; 491,-2107 588,-2107 ; 546,-2192 546,-2055 ; 547,-653 649,-653 ; 608,-1794 749,-1794 ; D2.1@671,-402 735,-402 ; v1@673,-491 D2.1@673,-371 ; 690,-1866 690,-1716 ; 917,-2175 1239,-2175 ; 1072,-2302 1072,-2016 ; 1896,-262 R17.1@1896,-242 ; 2033,-151 2149,-151 ; 3029,-1855 3029,-1679 ; 3062,-1527 3062,-1348 ; U5.5@3093,-1756 3093,-1667 ; 3418,-2171 3700,-2171 ; 3560,-2342 3560,-2076
  Top Layer w30: 66,-912 P2.2@66,-842 ; 198,-854 C15.2@269,-854
  Bottom Layer w20: 32,-842 120,-842 ; 66,-923 P2.2@66,-844 ; 546,-651 643,-651 ; 2021,-150 2142,-150 ; P5.2@2087,-155 2087,-85 ; 3897,-1523 4030,-1523
  other v1: 290,-2340 140,-2310 3210,-2310 3740,-2310 370,-2270 1700,-2250 490,-2240 2820,-2240 60,-2220 2940,-2160 2010,-2130 2310,-2030 420,-1920 1790,-1900 1860,-1900 2510,-1900 2190,-1890 1180,-1880 1470,-1870 3660,-1870 450,-1860 330,-1840 440,-1770 3540,-1750 3830,-1740 1270,-1690 2410,-1670 1490,-1640 60,-1620 690,-1620 2210,-1550 60,-1530 700,-1530 3020,-1490 3060,-1490 3620,-1470 1270,-1430 1440,-1390 610,-1380 3880,-1380 2070,-1310 530,-1250 570,-1250 340,-1160 370,-1160 340,-1130 370,-1130 2380,-1120 700,-1110 340,-1100 370,-1100 3960,-1090 710,-1080 3950,-990 3800,-980 2660,-950 2990,-950 3340,-950 190,-940 1600,-940 1630,-940 1660,-940 2100,-940 2130,-940 2160,-940 3390,-940 3640,-940 2440,-930 3100,-930 3850,-930 120,-910 3020,-840 170,-830 290,-700 821,-697 845,-697 150,-690 390,-690 1800,-670 2100,-670 2400,-670 2700,-670 510,-650 680,-650 950,-646 1800,-640 2100,-640 2400,-640 2700,-640 944,-548 938,-493 654,-491 705,-491 190,-490 430,-490 680,-490 3170,-410 3390,-410 871,-403 1790,-400 1820,-400 1850,-400 2040,-400 2070,-400 2100,-400 2910,-400 3240,-390 742,-386 3360,-380 3900,-380 3970,-370 3250,-350 3650,-350 2710,-320 480,-300 2600,-290 1872,-288 1894,-286 2820,-270 1781,-257 460,-250 874,-238 250,-230 290,-230 3680,-230 1780,-221 700,-220 830,-180 980,-180 2630,-180 2660,-180 3550,-180 2012,-155 710,-150 3260,-150 460,-130 3050,-130 1787,-120 2460,-100 670,-90 2810,-90 1788,-88 3250,-80 3640,-80 2580,-70 2220,-50
  other v4: 295.57,-177.05 247.34,-129.8 295.57,-129.8 247.34,-82.76 295.57,-82.56
  other v8: 247.34,-177.05
GPIO_0_CLKO: U1.126
"GPIO_4/SLEEP WAKE": U1.20
HDMI_CEC_IN: U1.90
HDMI_CLKM: U1.100
HDMI_CLKP: U1.98
HDMI_D0M: U1.104
HDMI_D0P: U1.102
HDMI_D1M: U1.96
HDMI_D1P: U1.94
HDMI_D2M: U1.88
HDMI_D2P: U1.86
HDMI_HPD: U1.92
I2C1_SCL: U1.106
I2C1_SDA: U1.108
I2C2_SCL: U1.158
I2C2_SDA: U1.160
I2C3_SCL: U1.118
I2C3_SDA: U1.120
KEY_COL2/SD3_CD_B: U1.21
LCD_CTL: P4.14 P4.15 R20.2 | length 397.4
  Top Layer w8: P4.15@1551,-118 1551,-175 1564,-188 P4.14@1564,-226 ; 1554,-167 R20.2@1838,-167
LVDS0_CLK_N: U1.141
LVDS0_CLK_P: U1.143
LVDS0_TX0_N: U1.133
LVDS0_TX0_P: U1.135
LVDS0_TX1_N: U1.145
LVDS0_TX1_P: U1.147
LVDS0_TX2_N: U1.131
LVDS0_TX2_P: U1.129
LVDS0_TX3_N: U1.137
LVDS0_TX3_P: U1.139
LVDS1_CLK_N: U1.146
LVDS1_CLK_P: U1.148
LVDS1_TX0_N: U1.136
LVDS1_TX0_P: U1.134
LVDS1_TX1_N: U1.130
LVDS1_TX1_P: U1.132
LVDS1_TX2_N: U1.144
LVDS1_TX2_P: U1.142
LVDS1_TX3_N: U1.138
LVDS1_TX3_P: U1.140
MISO: P7.3 U5.16 | length 956.9
  Top Layer w10: P7.3@2677,-1219 2677,-1153 2696,-1134 3210,-1134 3239,-1163 U5.16@3239,-1472
MOSI: P7.2 U5.15 | length 1240.8
  Top Layer w10: P7.2@2574,-1218 2574,-1135 2600,-1109 3273,-1109 3309,-1145 3309,-1501 3304,-1506 U5.15@3270,-1506
MX6_ONOFF: U1.37
NANDF_ALE: U1.150
NANDF_CLE: U1.152
NANDF_CS0: U1.11
NANDF_CS1: U1.13
NANDF_CS2: U1.15
NANDF_CS3: U1.155
NANDF_WP_B: U1.154
NetC1_1: C1.1 P1.4 P1.5 R1.1 | length 285.7
  Top Layer w10: R1.1@372,-1457 372,-1629 P1.5@410,-1667
  Top Layer w12: R1.1 C1.1
NetC20_1: C20.1 D2.2 L2.1 U3.8 | length 140.7
  Top Layer w15: U3.8@151,-210 151,-263 172,-284 ; C20.1@232.97,-284.86 C20.1@237,-285
  Top Layer w19.68: 172,-284 C20.1@226,-284
NetC20_2: C20.2 U3.1 | length 146.8
  Top Layer w15: C20.2@303,-284 373,-284 387,-270 U3.1@387,-213
NetC23_1: C23.1 U5.20 | length 104
  Top Layer w12: U5.20@3093,-1404 C23.1@3093,-1300
NetD3_2: D3.2 R15.2 | length 60
  Top Layer w12: D3.2@3885,-686 R15.2@3885,-626
NetD4_2: D4.2 R16.2 | length 63
  Top Layer w10: D4.2 D4.2@3810,-690
  Top Layer w12: D4.2@3810,-680 R16.2@3810,-620
NetD5_2: D5.2 R23.2 | length 68
  Top Layer w15: R23.2@3932,-2050 D5.2@3932,-1982
NetP1_10: P1.10 R7.1 | length 742.5
  Top Layer w10: R7.1@139,-1448 139,-1450 139,-1726 278,-1865 278,-2046 225,-2099 P1.10@225,-2111
NetP1_12: P1.12 R6.1 | length 802.7
  Top Layer w8: P1.12@640.99,-2107.99 P1.12
  Top Layer w10: R6.1 596,-1448 613,-1465 613,-1704 515,-1802 515,-1982 P1.12@640.99,-2107.99
NetR9_2: R9.2 U2.24 | length 89.8
  Top Layer w8: R9.2@190.21,-1183.21 U2.24
NetR11_1: R11.1 R12.1 U4.4 | length 228.2
  Top Layer w10: R11.1@825.1,-480 R12.1@898,-480 ; R12.1@890,-481 890,-438 927,-401 U4.4@927,-341
NetR13_1: R13.1 R14.1 U3.4 | length 254.3
  Top Layer w15: U3.4@386,-53 U3.4@389.13,-53.12 ; U3.4@403,-55 508,-55 523,-70 R13.1@523,-195
NetR23_1: R23.1 U5.2 | length 1109.5
  Top Layer w12: U5.2@2999,-1766 2999,-1998 3046,-2045 R23.1@3857,-2045
NRESET: C7.2 K1.3 K1.4 U1.39 | length 532.5
  Top Layer w8: U1.39@3112,-477 K1.3@3112,-303
  Top Layer w12: C7.2@3027,-279 3045,-297 K1.4@3378,-297
PCIE_RXM: U1.76
PCIE_RXP: U1.74
PCIE_TXM: U1.80
PCIE_TXP: U1.78
RST: C22.1 P7.5 R22.1 U5.29 | length 580.8
  Top Layer w12: C22.1@2728,-1599.75 U5.29 ; 2840,-1597 2840,-1253 2878,-1215 P7.5
SATA_RXN: U1.56
SATA_RXP: U1.54
SATA_TXN: U1.58
SATA_TXP: U1.60
SCK: P7.4 U5.17 | length 716.2
  Top Layer w10: P7.4@2780,-1215 2780,-1163 2786,-1157 3179,-1157 3188,-1166 U5.17@3188,-1416
SCL: P4.9
SD1_CLK: U1.156
SD1_DAT0/CSI0_PWN: U1.17
SD1_DAT1/TOUCH_NEINT1: U1.151
SD1_DAT2/RTC_GPIO: U1.153
SD2_CLK: U1.46
SD2_CMD: U1.50
SD2_DATA0: U1.44
SD2_DATA1: U1.52
SD2_DATA2: U1.42
SD2_DATA3: U1.48
SD3_CLK: U1.59
SD3_CMD: U1.57
SD3_DATA0: U1.63
SD3_DATA1: U1.61
SD3_DATA2: U1.55
SD3_DATA3: U1.53
SD3_RST/SD3_WP: U1.19
SDA: P4.10
STANDBY: P4.6 R21.2 | length 80
  Top Layer w8: R21.2@1658,-320 P4.6@1658,-240
UART1_RX: P3.1 U1.89 | length 333.6
  Top Layer w8: U1.89@2379,-505 2379,-413 2489,-303 P3.1@2489,-217
UART1_TX: P3.2 U1.91 | length 284.1
  Top Layer w8: U1.91@2356,-528 U1.91@2355.99,-522.14 ; U1.91@2356,-488 2356,-383 2388,-351 P3.2@2388,-223
UART2_CTS: U1.26
UART2_RTS: U1.28
UART2_RXD: U1.32 U5.31 | length 976.7
  Top Layer w8: U5.31@2939,-1662 2983,-1662 3032,-1613 v3@3032,-1611 ; v3@3194.05,-905.05 U1.32@3194.05,-880
  Bottom Layer w8: v3@3038,-1609 3152,-1609 3194,-1567 v3@3194,-904
  other v3: 3033,-1610 3192,-905
UART2_TXD: U1.30 U5.30 | length 1007.2
  Top Layer w8: U5.30@2938,-1632 v3(2978,-1632) ; U1.30@3218.05,-878 3219,-878.95 v3@3219,-904
  Top Layer w12: U5.30@2908,-1631 U5.30@2909.68,-1631.01
  Bottom Layer w8: v3@2978,-1631 3168,-1631 3219,-1580 v3@3219,-903
  other v3: 3220,-903
UART3_CTS: U1.34
UART3_RTS: U1.36
UART3_RXD: U1.40
UART3_TXD: U1.38
UART4_RXD: U1.123
UART4_TXD: U1.121
UART5_RXD: U1.125
UART5_TXD: U1.127
USB_H1_OC: U1.73
USB_H1_PWR_EN: U1.67
USB_H1_VBUS: U1.75
USB_HOST_DN: U1.69
USB_HOST_DP: U1.71
USB_OTG_DN: U1.66
USB_OTG_DP: U1.68
USB_OTG_ID: U1.72
USB_OTG_OC: U1.62
USB_OTG_PWR_EN: U1.64
USB_OTG_VBUS: U1.70
pads on no net: P1. P1.7 P4.0 P4.3 P4.4 P4.5 P4.12 P4.13 P4.16 P4.17 P4.18 U1.0 U2.4 U2.14 U3.2 U3.3 U3.5 U5.1 U5.7 U5.8 U5.9 U5.10 U5.11 U5.14 U5.19 U5.22 U5.23 U5.24 U5.25 U5.26 U5.27 U5.28 U5.32

## Polygon pours and split planes (outlines as drawn)
GND on Top Layer "Bottom Layer-No Net" (solid, remove dead copper): -375,225 -334,184 4472,184 4472,-2453 4305,-2620 4270,-2655 -191,-2655
GND on Bottom Layer "Bottom Layer-No Net" (solid, remove dead copper): -246,144 4242,144 4328,230 4171,73 4171,-2654 -89,-2654 -161,-2582

## Keep-outs
Keep-Out Layer:
  circle w7.87: c3897.64,-2244.09 r59.06
  circle w7.87: c3897.64,-157.48 r59.06
  lines w8: 0,-2411 4065,-2411 4065,0 0,0 0,-2411

## Other copper
Top Layer:
  rectangle net GND: 774,-95 978,-49
  rectangle net GND: 838,-170 909,-74
  rectangle net GND: 648,-501 702,-415
  rectangle net GND: 888,-558 928,-538
  rectangle net GND: 832,-653 933,-618
  rectangle net GND: 3464,-543 3586,-502
  rectangle net GND: 160,-120 240,-90
  rectangle net GND: 250,-240 300,-40
  rectangle net NetC20_1: 120,-269 184,-191
  rectangle net NetC20_1: 119,-452 203,-233
  rectangle net 3P3V: 3357,-854 3432,-814
  rectangle net 5VIN: 3451,-854 3549,-817
  rectangle net 5VIN: 134,-604 651,-524
  rectangle net NetC20_1: 120,-455 565,-351
Bottom Layer:
  rectangle net GND: 182,-200 348,-45

## Silkscreen, mask and mechanical layers (free items; w line width, h text height)
Top Overlay:
  text "TX" at 2355,-150 h60
  text "RX" at 2460,-150 h60
  text "12V" at 10,-665 h60
  text "MO" at 2545,-1320 h60
  text "MI" at 2655,-1320 h60
  text "CK" at 2740,-1320 h60
  text "RS" at 2845,-1320 h60

## Text inside footprints (layer, text, board x,y; h text height)
U1: Top Overlay "200" at 1044,-602 h39.37 r90; Top Overlay "1" at 3614,-514 h39.37 r180